# Altium PCB [R0] Receiver- BlackChat.PcbDoc
Units mil, origin at the board's own origin, x right, y up, seen from the top; angles counter-clockwise.
Board outline 1715 x 1265 mil, 2 copper layers (Top Layer, Bottom Layer); 45 components, 22 nets, 104 pads, 68 vias.
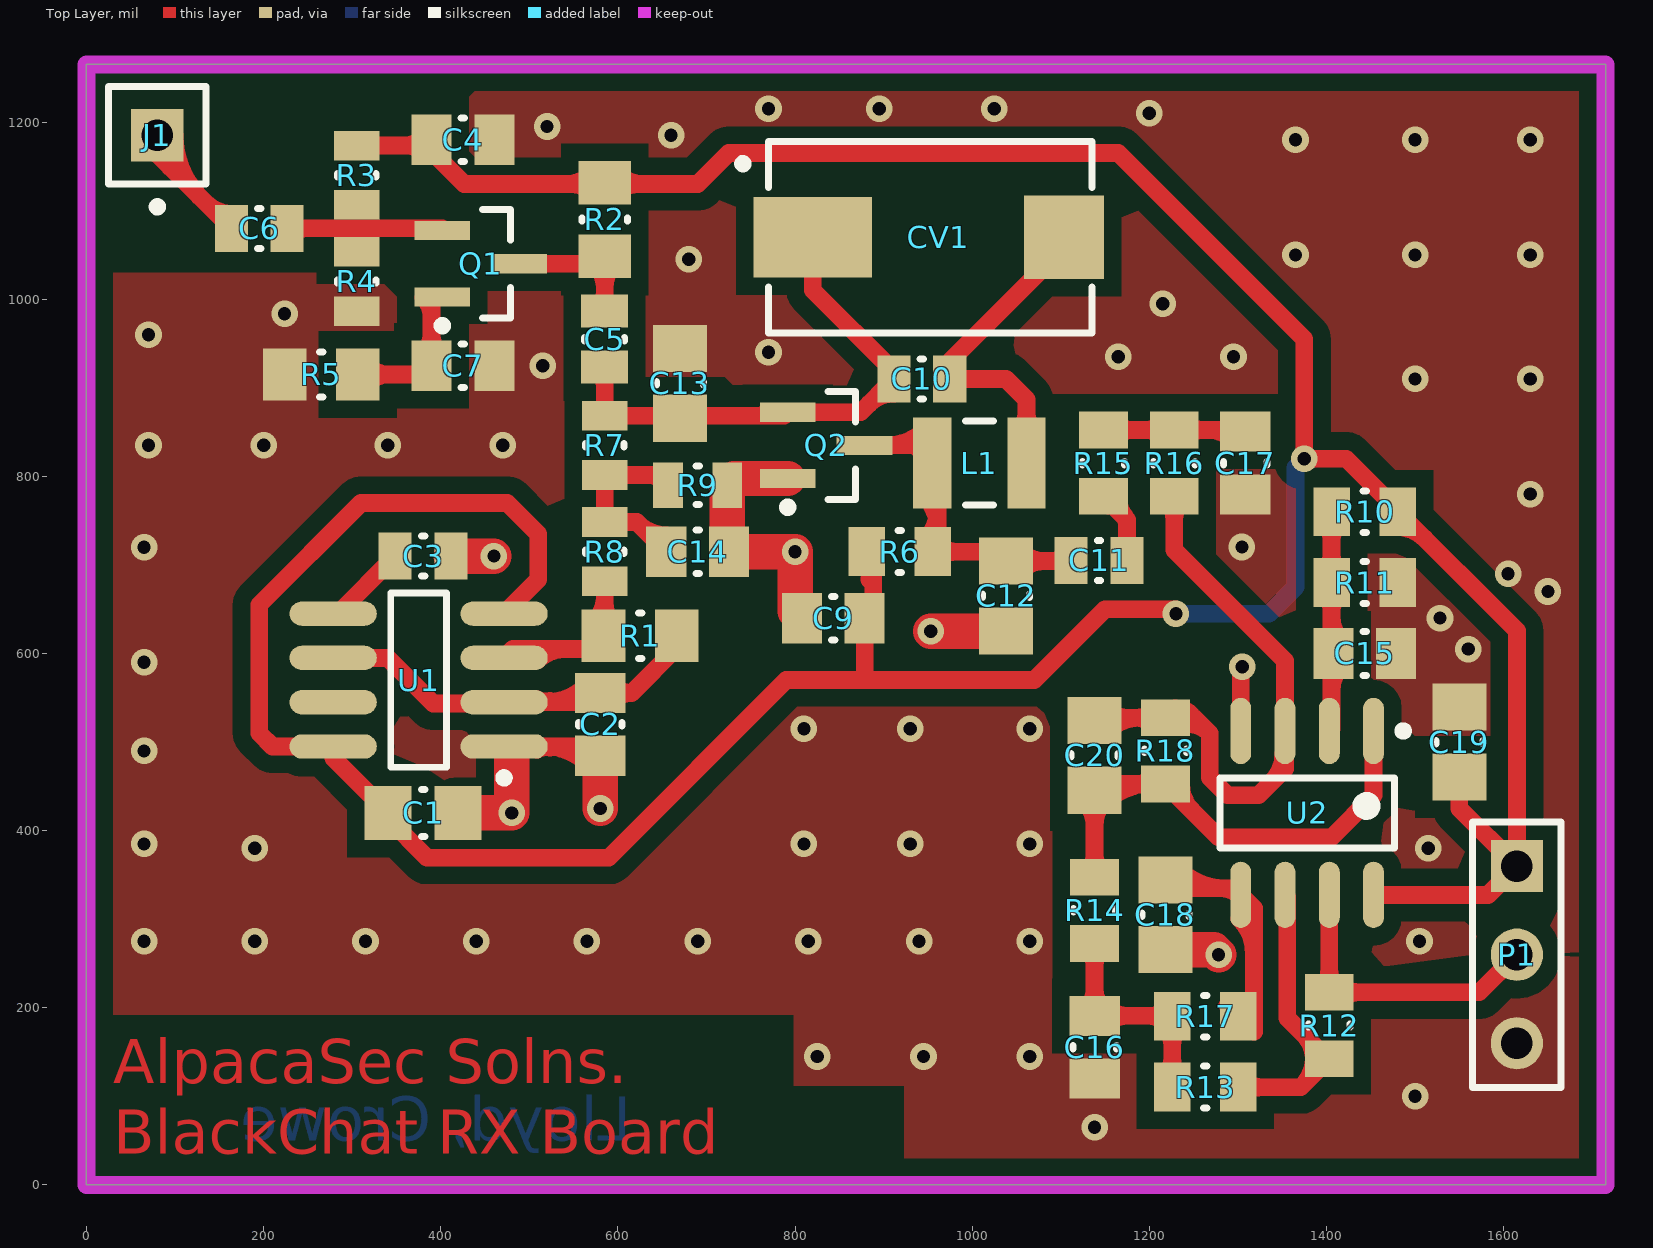
[diagram p0: Top Layer view]
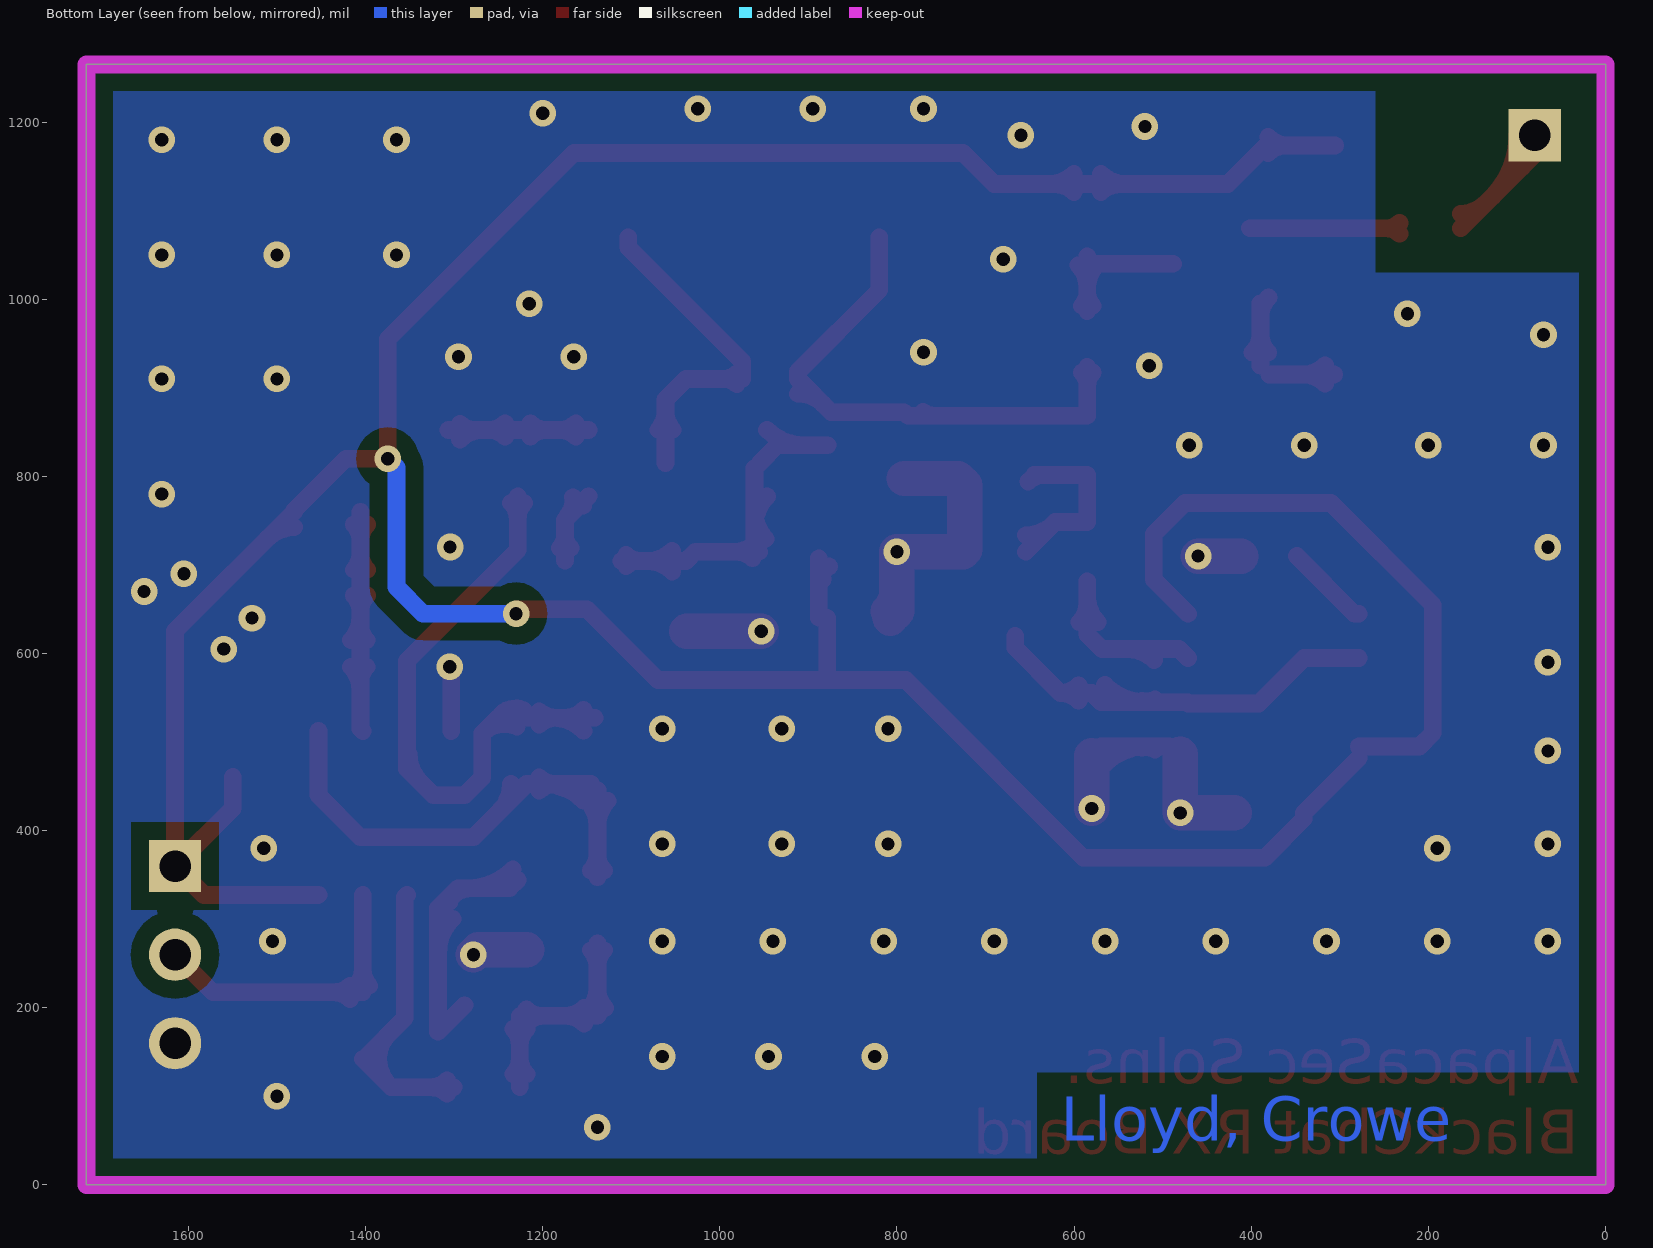
[diagram p1: Bottom Layer view, seen from below]

## Layer stack, top to bottom
Top Layer: signal copper 1.4
Dielectric: dielectric 12.6, FR-4, Dk 4.8
Bottom Layer: signal copper 1.4

## Board outline
0,0 1715,0 1715,1265 0,1265

## Design rules (kind name [scope] priority, off if disabled: settings)
Clearance "Clearance Polygon" [InPolygon] p1: gap=20
Clearance [All] p2: gap=10
PolygonConnect [All] p1: connectstyle=Direct reliefconductorwidth=10 reliefentries=4 polygonreliefangle="90 Angle" airgapwidth=10
RoutingVias [All] p1: holewidth=28 width=50 viastyle="Through Hole" minholewidth=28 minwidth=50 maxholewidth=28 maxwidth=50
SolderMaskExpansion [All] p1: expansion=4
Width [All] p1: maxlimit=100 minlimit=10 preferedwidth=10 minimp=50.000000 maximp=50.000000 favimp=50.000000
28 further rules are at their usual default settings.

## Components (designator, comment, footprint, x,y, rotation, side; value= is the part's Value field where it differs from the comment)
C1 "CAP 100nF 25V 0805(2012)" CAPC0805(2012)100_M 380,420 r0 top
C2 "CAP 1nF 25V 0805(2012)" CAPC0805(2012)100_N 580,520 r90 top
C3 "CAP 10nF 25V 0805(2012)" CAPC0805(2012)75_L 380,710 r180 top
C4 "CAP 1nF 16V 0805(2012)" CAPC0805(2012)145_N 425,1180 r180 top
C5 "CAP 2.2pF 16V 0805(2012)" CAPC0805(2012)75_L 585,955 r270 top
C6 "CAP 22pF 16V 0805(2012)" CAPC0805(2012)75_L 195,1080 r0 top
C7 "CAP 560pF 16V 0805(2012)" CAPC0805(2012)145_N 425,925 r0 top
C9 "CAP 10nF 16V 0805(2012)" CAPC0805(2012)145_N 843.15,640 r180 top
C10 "CAP 1.5pF 16V 0805(2012)" CAPC0805(2012)100_L 943.15,910 r0 top
C11 "CAP 100nF 16V 0805(2012)" CAPC0805(2012)100_L 1143.15,705 r0 top
C12 "CAP 5.6pF 16V 0805(2012)" CAPC0805(2012)75_M 1038.15,665 r90 top
C13 "CAP 5.6pF 16V 0805(2012)" CAPC0805(2012)75_M 670,905 r270 top
C14 "CAP 560pF 16V 0805(2012)" CAPC0805(2012)145_N 690,715 r180 top
C15 "CAP 10nF 16V 0805(2012)" CAPC0805(2012)145_N 1443.15,600 r180 top
C16 "CAP 10nF 16V 0805(2012)" CAPC0805(2012)145_N 1138.15,155.43 r90 top
C17 "CAP 1nF 25V 0805(2012)" CAPC0805(2012)100_N 1308.15,815 r90 top
C18 "CAP 100nF 25V 0805(2012)" CAPC0805(2012)100_M 1218.15,305 r270 top
C19 "CAP 100nF 25V 0805(2012)" CAPC0805(2012)100_M 1550,500 r90 top
C20 "CAP 5.6pF 16V 0805(2012)" CAPC0805(2012)75_M 1138.15,485 r90 top
CV1 "0.5-4.5pf" CAP-GSX364 820,1070 r0 top
J1 "Socket" PIN1 80,1185 r180 top
L1 "56nH" C1210 1008.15,815 r180 top
P1 "Header 3" HDR1X3 1615,360 r270 top
Q1 "NE68033" SOT95P275X120-3N 445,1040 r0 top
Q2 "NE68033" SOT95P275X120-3N 835,835 r0 top
R1 "3K3 5% 0805(2012)" RESC0805(2012)_M 625,620 r0 top
R2 "300R 1% 0805(2012)" RESC0805(2012)_M 585,1090 r90 top
R3 "47K 5% 0805(2012)" RESC0805(2012)_L 305,1140 r90 top
R4 "20K 5% 0805(2012)" RESC0805(2012)_L 305,1020 r90 top
R5 "100R 5% 0805(2012)" RESC0805(2012)_M 265,915 r0 top
R6 "1K 5% 0805(2012)" RESC0805(2012)_N 918.15,715 r180 top
R7 "47K 5% 0805(2012)" RESC0805(2012)_L 585,835 r90 top
R8 "10K 5% 0805(2012)" RESC0805(2012)_L 585,715 r270 top
R9 "10K 5% 0805(2012)" RESC0805(2012)_L 690,790 r180 top
R10 "47K 1% 0805(2012)" RESC0805(2012)_N 1443.15,760 r180 top
R11 "47K 1% 0805(2012)" RESC0805(2012)_N 1443.15,680 r0 top
R12 "1M 1% 0805(2012)" RESC0805(2012)_N 1403.15,180 r90 top
R13 "1K 5% 0805(2012)" RESC0805(2012)_N 1263.15,110.43 r0 top
R14 "10K 5% 0805(2012)" RESC0805(2012)_N 1138.15,310 r270 top
R15 "47K 1% 0805(2012)" RESC0805(2012)_N 1148.15,815 r90 top
R16 "20K 1% 0805(2012)" RESC0805(2012)_N 1228.15,815 r270 top
R17 "1M 1% 0805(2012)" RESC0805(2012)_N 1263.15,190.43 r0 top
R18 "1M 1% 0805(2012)" RESC0805(2012)_N 1218.15,490 r270 top
U1 "LMC555CM/NOPB" M08A_M 375,570 r180 top
U2 "TLC27M2BCD" TI-D8_L 1378.15,420 r270 top

## Footprints (in the part's own frame and the unit in brackets; to place one, negate y for a bottom-side part, rotate by r counter-clockwise, add the part's x,y. Pads: shape width x height; smd on the part's side, far side on the other; paste and mask are expansions set on the pad)
C1210 [mm] "Chip Capacitor, Body 3.2x2.5mm, IPC High Density"
  rect 1.1x2.6 smd: 1(-1.35,0) 2(1.35,0)
  silkscreen extent -0.4,-1.2 0.4,1.2, body extent -1.7,-1.35 1.7,1.35, height 1.3
CAP-GSX364 [mm] "Trimmer / Variable Capacitors .5-4.5 PF 100V"
  rect 3.4x2.3 smd: 1(0,0)
  rect 2.3x2.4 smd: 2(7.2,0)
  silkscreen extent -2.13,-2.75 8,2.75, body extent -1.27,-2.7 8,2.7, height 2.2
CAPC0805(2012)75_L [mm] "Chip Capacitor, Body 2.0x1.2mm, Height 0.75mm, IPC High Density"
  rect 0.95x1.35 smd: 1(-0.8,0) 2(0.8,0)
  silkscreen extent -0.05,-0.58 0.05,0.58, body extent -1.1,-0.72 1.1,0.72, height 0.75
CAPC0805(2012)75_M [mm] "Chip Capacitor, Body 2.0x1.2mm, Height 0.75mm, IPC Low Density"
  rect 1.35x1.55 smd: 1(-1,0) 2(1,0)
  silkscreen extent -0.05,-0.67 0.05,0.68, body extent -1.1,-0.72 1.1,0.72, height 0.75
CAPC0805(2012)100_L [mm] "Chip Capacitor, Body 2.0x1.2mm, Height 1.0mm, IPC High Density"
  rect 0.95x1.35 smd: 1(-0.8,0) 2(0.8,0)
  silkscreen extent -0.05,-0.58 0.05,0.58, body extent -1.1,-0.72 1.1,0.72, height 1
CAPC0805(2012)100_M [mm] "Chip Capacitor, Body 2.0x1.2mm, Height 1.0mm, IPC Low Density"
  rect 1.35x1.55 smd: 1(-1,0) 2(1,0)
  silkscreen extent -0.05,-0.67 0.05,0.67, body extent -1.1,-0.72 1.1,0.72, height 1
CAPC0805(2012)100_N [mm] "Chip Capacitor, Body 2.0x1.2mm, Height 1.0mm, IPC Medium Density"
  rect 1.15x1.45 smd: 1(-0.9,0) 2(0.9,0)
  silkscreen extent -0.05,-0.62 0.05,0.62, body extent -1.1,-0.72 1.1,0.73, height 1
CAPC0805(2012)145_N [mm] "Chip Capacitor, Body 2.0x1.2mm, Height 1.45mm, IPC Medium Density"
  rect 1.15x1.45 smd: 1(-0.9,0) 2(0.9,0)
  silkscreen extent -0.05,-0.62 0.05,0.62, body extent -1.1,-0.72 1.1,0.73, height 1.45
HDR1X3 [mm] "Connector; Header; 3 Position"
  rect 1.5x1.5 hole 0.9: 1(0,0)
  round 1.5 hole 0.9: 2(2.54,0) 3(5.08,0)
  silkscreen extent -1.27,-1.27 6.35,1.27
M08A_M [mm] "SOIC, 8-Leads, Body 4.9x3.9mm, Pitch 1.27mm, IPC Low Density"
  oval 2.5x0.7 smd: 1(-2.45,1.905) 2(-2.45,0.635) 3(-2.45,-0.635) 4(-2.45,-1.905) 5(2.45,-1.905) 6(2.45,-0.635) 7(2.45,0.635) 8(2.45,1.905)
  silkscreen extent -2.58,-2.5 0.8,2.93, body extent -2,-2.5 2,2.5, height 1.75
PIN1 [mm] "Connector; Plug"
  rect 1.5x1.5 hole 0.9: 1(0,0)
  silkscreen extent -1.4,-1.4 1.4,2.17
RESC0805(2012)_L [mm] "Chip Resistor, Body 2.0x1.3mm, IPC High Density"
  rect 0.85x1.3 smd: 1(-0.85,0) 2(0.85,0)
  silkscreen extent -0.05,-0.55 0.05,0.55, body extent -1.1,-0.67 1.1,0.68, height 0.7
RESC0805(2012)_M [mm] "Chip Resistor, Body 2.0x1.3mm, IPC Low Density"
  rect 1.25x1.5 smd: 1(-1.05,0) 2(1.05,0)
  silkscreen extent -0.05,-0.65 0.05,0.65, body extent -1.1,-0.67 1.1,0.67, height 0.7
RESC0805(2012)_N [mm] "Chip Resistor, Body 2.0x1.3mm, IPC Medium Density"
  rect 1.05x1.4 smd: 1(-0.95,0) 2(0.95,0)
  silkscreen extent -0.05,-0.6 0.05,0.6, body extent -1.1,-0.67 1.1,0.68, height 0.7
SOT95P275X120-3N [mm] "SOT23, 3-Leads, Body 2.90x2.75mm, Pitch 0.95mm, IPC Medium Density"
  rect 1.6x0.55 smd: 1(-1.1,-0.95) 2(-1.1,0.95) 3(1.1,0)
  silkscreen extent -1.22,-1.9 0.85,1.55, body extent -0.85,-1.55 0.85,1.55, height 1.2
TI-D8_L [mm] "SOIC, 8-Leads, Body 4.9x3.9mm, Pitch 1.27mm, IPC High Density"
  oval 1.9x0.6 smd: 1(-2.35,1.905) 2(-2.35,0.635) 3(-2.35,-0.635) 4(-2.35,-1.905) 5(2.35,-1.905) 6(2.35,-0.635) 7(2.35,0.635) 8(2.35,1.905)
  silkscreen extent -2.47,-2.5 1,2.88, body extent -2,-2.5 2,2.5, height 1.75

## Part data
C1 C18 C19: library part CMP-1036-04409-1, "CAP 100nF 25V ±5% 0805 (2012 Metric) Thickness 1mm SMD"
C2 C17: library part CMP-1036-02963-1, "CAP 1nF 25V ±1% 0805 (2012 Metric) Thickness 1mm SMD"
C3: library part CMP-1036-03827-1, "CAP 10nF 25V ±5% 0805 (2012 Metric) Thickness 0.75mm SMD"
C4: library part CMP-1036-02959-1, "CAP 1nF 16V ±10% 0805 (2012 Metric) Thickness 1.45mm SMD"
C5: library part CMP-1036-00271-1, "CAP 2.2pF 16V ±0.5pF 0805 (2012 Metric) Thickness 0.75mm SMD"
C6: library part CMP-1036-01219-1, "CAP 22pF 16V ±5% 0805 (2012 Metric) Thickness 0.75mm SMD"
C7 C14: library part CMP-1036-02734-1, "CAP 560pF 16V ±10% 0805 (2012 Metric) Thickness 1.45mm SMD"
C9 C15 C16: library part CMP-1036-03817-1, "CAP 10nF 16V ±5% 0805 (2012 Metric) Thickness 1.45mm SMD"
C10: library part CMP-1036-00160-1, "CAP 1.5pF 16V ±0.1pF 0805 (2012 Metric) Thickness 1mm SMD"
C11: library part CMP-1036-04400-1, "CAP 100nF 16V ±5% 0805 (2012 Metric) Thickness 1mm SMD"
C12 C13 C20: library part CMP-1036-00602-1, "CAP 5.6pF 16V ±0.25pF 0805 (2012 Metric) Thickness 0.75mm SMD"
CV1: library part GSX364, "0.5pF to 4.5pF variable capacitor."
L1: library part Inductor, "Generic Inductor"
P1: "Header, 3-Pin"
Q1 Q2: "NPN SILICON HIGH FREQUENCY TRANSISTOR"
R1: library part CMP-1013-00086-1, "3K3 0.125W 5% 0805 (2012 Metric)  SMD"
R2: library part CMP-1013-00449-1, "300R 0.125W 1% 0805 (2012 Metric)  SMD"
R3 R7: library part CMP-1013-00114-1, "47K 0.125W 5% 0805 (2012 Metric)  SMD"
R4: library part CMP-1013-00105-1, "20K 0.125W 5% 0805 (2012 Metric)  SMD"
R5: library part CMP-1013-00050-1, "100R 0.125W 5% 0805 (2012 Metric)  SMD"
R6 R13 R14: library part CMP-1013-00074-1, "1K 0.125W 5% 0805 (2012 Metric)  SMD"
R8 R9: library part CMP-1013-00098-1, "10K 0.125W 5% 0805 (2012 Metric)  SMD"
R10 R11 R15: library part CMP-1013-00699-1, "47K 0.125W 1% 0805 (2012 Metric)  SMD"
R12 R17 R18: library part CMP-1013-00849-1, "1M 0.125W 1% 0805 (2012 Metric)  SMD"
R16: library part CMP-1013-00655-1, "20K 0.125W 1% 0805 (2012 Metric)  SMD"
U1: library part CMP-0056-00124-2, "CMOS Timer, 8-pin Narrow SOIC, Pb-Free"
U2: library part CMP-0017-00353-1, "LinCMOS(TM) Precision Dual Operational Amplifier, 3 to 16 V, 0 to 70 degC, 8-pin SOIC (D8), Green (RoHS & no Sb/Br)"

## Via types
v1: diameter 30, hole 15, Top Layer to Bottom Layer, 68 vias

## Nets (pads, with @x,y where several pads share a name; then routed paths per layer and width w, separated by ;. In a path a pad name is that pad's centre, name@x,y a point inside that pad or via, vN(x,y) a via of type N, cw(c..) or ccw(c..) an arc to the next point about the centre after c; other vN are vias at no path point)
5V0: C1.1 C4.2 C9.1 C19.1 P1.1 R2.2 R3.2 R6.2 R10.1 U1.4 U1.8 U2.8 | length 4692.7
  Top Layer w20: U1.8@278.54,482.09 C1.1 340.63,413.37 384.51,369.49 589.49,369.49 790,570 1070,570 1150,650 v1@1230,650 ; U1.8 210,495 195,510 195,655 310,770 475,770 510,735 510,683.54 U1.4 ; R3.2 383.03,1173.46 426.5,1130 690,1130 725,1165 1165,1165 1375,955 v1(1375,820) 1422.26,820 1480.55,761.71 R10.1 1615,625.55 P1.1 ; 357.53,1173.46 ccw(c357.53,1206.13) C4.2@380.63,1183.03 ; 360.58,1173.46 cw(c360.58,1145.1) C4.2@380.63,1165.16 ; 541.59,1130 ccw(c541.59,1169.83) R2.2@569.75,1141.67 ; 548.05,1130 cw(c548.05,1099.31) R2.2@569.75,1121.01 ; R2.2@600.25,1121.01 cw(c621.95,1099.31) 621.95,1130 ; R2.2@600.25,1141.67 ccw(c628.41,1169.83) 628.41,1130 ; R6.2@876.67,698.25 cw(c871.93,686.81) 883.89,683.61 ; 878.58,571.42 C9.1 ; C9.1@888.15,640.43 R6.2@888.15,707.6 ; U2.8 1453.21,327.42 1582.42,327.42 P1.1 ; R10.1@1480.55,742.44 cw(c1480.55,700.05) 1510.53,730.03 ; C19.1 1550,425 P1.1
  Bottom Layer w20: v1(1230,645) 1335,645 1365,675 1365,810 v1(1375,820)
AMP_BUFFER: C5.1 Q1.3 R2.1 | length 235.9
  Top Layer w20: Q1.3 R2.1@573.66,1040 ; R2.1@574.67,1038.33 cw(c549.74,1013.4) 585,1013.4 cw(c620.26,1013.4) R2.1@595.33,1038.33 ; C5.1@578.85,992.65 ccw(c563.99,1007.5) 585,1007.5 ccw(c606.01,1007.5) C5.1@591.15,992.65 ; C5.1 R2.1
ANTENNA: C6.1 J1.1 | length 288.7
  Top Layer w20: J1.1@79.53,1185 ccw(c130.28,1185) 94.39,1149.11 ; J1.1 80,1163.5 C6.1 ; J1.1@99.53,1185 ccw(c198.57,1185) 128.54,1114.97 ; 135.21,1108.29 ccw(c163.5,1136.59) C6.1@163.5,1096.57
DATA_RX: P1.2 R12.2 U2.7 | length 420.5
  Top Layer w20: R12.2@1395.61,224.95 ccw(c1377.39,243.16) 1403.15,243.16 ccw(c1428.91,243.16) R12.2@1410.69,224.95 ; U2.7@1403.15,327.48 1403.15,217.4 1572.4,217.4 P1.2 ; R12.2@1417.58,209.86 cw(c1435.8,191.64) 1435.8,217.4 cw(c1435.8,243.16) R12.2@1417.58,224.95
DETECTOR: C11.1 C12.2 L1.2 Q2.3 R6.1 | length 594.7
  Top Layer w20: Q2.3 935,835 L1.2 ; Q2.3@903.86,835 ccw(c903.86,895.66) L1.2@946.76,852.77 ; L1.2@946.76,777.23 cw(c912.99,743.46) 960.75,743.46 ; R6.1@948.01,729.43 ccw(c917.25,760.19) 960.75,760.19 ; R6.1 1027.52,715 1038.15,704.37 C11.1@1111.02,704.37 ; R6.1@960.75,715 L1.2@960.75,809.25 ; R6.1@963.1,707.46 cw(c981.31,689.24) 981.31,715 cw(c981.31,740.76) R6.1@963.1,722.54 ; C12.2@1053.81,692.65 cw(c1082.1,664.35) 1082.1,704.37 cw(c1082.1,744.38) C12.2@1053.81,716.09 ; 1089.13,704.37 ccw(c1089.13,727.53) C11.1@1105.5,711.15 ; 1092.17,704.37 cw(c1092.17,685.51) C11.1@1105.5,698.85
FILTER: C16.2 R13.1 R14.2 R17.1 | length 506.6
  Top Layer w20: C16.2@1129.21,199.8 ccw(c1107.64,221.38) 1138.15,221.38 ccw(c1168.66,221.38) C16.2@1147.09,199.8 ; R14.2@1130.61,265.05 cw(c1112.39,246.84) 1138.15,246.84 cw(c1163.91,246.84) R14.2@1145.69,265.05 ; R14.2@1138.15,272.6 1138.15,190.87 R17.1@1225.32,190.87 ; C16.2@1152.99,181.93 cw(c1174.57,160.36) 1174.57,190.87 cw(c1174.57,221.38) C16.2@1152.99,199.8 ; 1198.95,190.87 cw(c1198.95,163.63) R17.1@1218.2,182.89 ; 1201.03,190.87 ccw(c1201.03,215.15) R17.1@1218.2,197.98 ; R13.1@1218.2,124.87 ccw(c1199.99,143.08) 1225.75,143.08 ccw(c1251.51,143.08) R13.1@1233.29,124.87 ; R17.1@1218.2,176 cw(c1199.99,157.79) 1225.75,157.79 cw(c1251.51,157.79) R17.1@1233.29,176 ; R13.1 R17.1
GND: C1.2 C2.1 C3.1 C4.1 C7.2 C9.2 C12.1 C13.1 C14.1 C15.1 C16.1 C17.1 C18.2 C19.2 P1.3 Q2.1 R4.1 R5.1 R9.1 R11.2 U1.1 U2.4 | length 934.4
  Top Layer w20: U1.1@492.32,495 569.57,495 C2.1 ; U1.1@508.78,491.73 cw(c518.43,475.02) 523.42,493.65 ; U1.1@518.4,495 cw(c518.4,428.87) C2.1@565.16,475.63 ; U2.4 v1@1303.15,583.15
  Top Layer w40: C3.1 v1(460,710) ; C1.2 v1(480,420) U1.1@480,486.46 ; v1(580,425) C2.1 ; C14.1@723.46,716.97 R9.1 731.06,797.6 Q2.1 ; C14.1 v1(800,715) 800,647.72 C9.2 ; 800,670.9 ccw(c832.71,670.9) C9.2@809.58,647.77 ; v1(953.15,625) C12.1@1037.52,625 ; C18.2@1218.15,265.63 1272.52,265.63 v1(1278.15,260)
  other v1: 1138.15,65 1500,100 825,145 945,145 1065,145 65,275 190,275 315,275 440,275 565,275 690,275 815,275 940,275 1065,275 1505,275 190,380 1515,380 65,385 810,385 930,385 1065,385 65,490 810,515 930,515 1065,515 1305,585 65,590 1560,605 1528.15,640 1650,670 1605,690 65,720 1304.5,720.26 1630,780 70,835 200,835 340,835 470,835 1500,910 1630,910 515,925 1165,935 1295,935 770,940 70,960 223.66,983.66 1215,995 680,1045 1365,1050 1500,1050 1630,1050 1365,1180 1500,1180 1630,1180 660,1185 520,1195 1200,1210 770,1215 895,1215 1025,1215
NetC2_2: C2.2 R1.2 U1.2 U1.6 | length 562.3
  Top Layer w20: U1.6 340,595 391.46,543.54 471.46,543.54 U1.2 569.57,545 C2.2 615.43,555.43 ; U1.2@508.78,548.27 ccw(c518.42,564.98) 523.42,546.35 ; U1.2@518.39,545 ccw(c518.39,611.13) C2.2@565.16,564.37 ; C2.2@595.05,546.71 cw(c615.43,527.26) 615.43,555.43 ; C2.2@595.05,564.16 ccw(c615.43,583.6) 615.43,555.43 ; R1.2 666.34,606.34 615.43,555.43
NetC3_2: C3.2 U1.5 | length 96.9
  Top Layer w20: U1.5 283.5,645 C3.2
NetC5_2: C5.2 C10.1 C13.2 CV1.1 Q2.2 R7.2 | length 667.8
  Top Layer w20: C5.2@578.85,917.35 cw(c563.99,902.5) 585,902.5 cw(c606.01,902.5) C5.2@591.15,917.35 ; C5.2 R7.2 Q2.2@787.76,868.46 ; 759.52,868.46 ccw(c759.52,883.9) Q2.2@770.44,872.99 ; Q2.2 874.06,872.4 C10.1 911.65,918.35 820,1010 CV1.1 ; 883.36,881.7 cw(c911.65,853.41) C10.1@911.65,893.43
NetC6_2: C6.2 Q1.2 R3.1 R4.2 | length 194.7
  Top Layer w20: C6.2@232.65,1073.85 cw(c247.5,1058.99) 247.5,1080 cw(c247.5,1101.01) C6.2@232.65,1086.15 ; C6.2@240,1080 Q1.2@401.69,1080
NetC7_1: C7.1 Q1.1 R5.2 | length 271.5
  Top Layer w20: R5.2 C7.1@379.57,915 ; R5.2@316.67,904.67 cw(c341.6,879.74) 341.6,915 cw(c341.6,950.26) R5.2@316.67,925.33 ; Q1.1@380.44,1002.01 cw(c358.4,979.97) 389.57,979.97 ; C7.1@380.63,939.84 ccw(c359.06,961.41) 389.57,961.41 ccw(c420.08,961.42) C7.1@398.5,939.84 ; C7.1 Q1.1@389.57,995.47
NetC10_2: C10.2 CV1.2 L1.1 | length 458.6
  Top Layer w20: C10.2@980.8,903.85 cw(c995.65,888.99) 995.65,910 cw(c995.65,931.01) C10.2@980.8,916.15 ; L1.1@1053.06,852.77 ccw(c1033.17,872.66) 1061.3,872.66 ccw(c1089.44,872.66) L1.1@1069.54,852.77 ; L1.1 1061.3,886.85 1038.15,910 C10.2 974.65,929.65 1103.46,1058.46 CV1.2
NetC11_2: C11.2 R15.1 | length 177.7
  Top Layer w20: R15.1@1148.15,777.6 1174.65,751.1 ; R15.1@1154.14,766.97 cw(c1152.24,744.64) 1174.65,744.64 ; R15.1@1165.65,776.49 ccw(c1196.77,773.23) 1174.64,751.1 ; C11.2@1168.49,719.03 ccw(c1153.64,733.88) 1174.65,733.88 ccw(c1195.65,733.88) C11.2@1180.8,719.03 ; C11.2 1174.65,751.1
NetC14_2: C14.2 R7.1 R8.1 R9.2 | length 251.6
  Top Layer w20: 622.91,746.65 ccw(c654.57,778.31) C14.2@654.57,733.54 ; 633.82,801.54 cw(c633.82,776.14) R9.2@651.78,794.1 ; R9.2@645,801.54 R7.1 R8.1 621.1,748.46 C14.2
NetC15_2: C15.2 R10.2 R11.1 U2.2 | length 465.8
  Top Layer w20: R11.1@1398.2,665.57 cw(c1379.99,647.35) 1405.75,647.35 cw(c1431.51,647.35) R11.1@1413.29,665.57 ; R11.1@1398.2,694.43 ccw(c1379.99,712.65) 1405.75,712.65 ccw(c1431.51,712.65) R11.1@1413.29,694.43 ; R10.2@1398.2,745.57 cw(c1379.99,727.35) 1405.75,727.35 cw(c1431.51,727.35) R10.2@1413.29,745.57 ; C15.2@1398.78,585.16 cw(c1381.96,568.34) 1405.75,568.34 ; C15.2@1398.78,614.84 ccw(c1381.96,631.66) 1405.75,631.66 ; U2.2@1403.15,512.52 1405.75,515.12 R10.2 ; 1405.75,558.83 cw(c1442.98,558.83) C15.2@1416.65,585.16 ; 1405.75,641.17 ccw(c1442.98,641.17) C15.2@1416.65,614.84
NetC17_2: C17.2 R15.2 R16.1 | length 327.3
  Top Layer w20: R15.2@1148.15,852.4 C17.2@1306.18,852.4 ; R15.2@1162.58,844.86 cw(c1180.8,826.64) 1180.8,852.4 cw(c1180.8,878.16) R15.2@1162.58,859.95 ; R16.1@1213.72,844.86 ccw(c1195.5,826.64) 1195.5,852.4 ccw(c1195.5,878.16) R16.1@1213.72,859.95 ; R16.1@1242.58,844.86 cw(c1260.8,826.64) 1260.8,852.4 cw(c1260.8,878.16) R16.1@1242.58,859.95 ; 1266.98,852.4 cw(c1266.98,815.17) C17.2@1293.31,841.5 ; 1276.48,852.4 ccw(c1276.48,876.19) C17.2@1293.31,859.37
NetC18_1: C18.1 R17.2 U2.5 | length 455.5
  Top Layer w20: C18.1@1228.15,344.37 1237.52,335 1295.63,335 1303.15,327.48 1318.15,312.48 1318.15,172.83 R17.2@1288.15,202.83 ; C18.1@1233.81,356.09 ccw(c1284.72,407.01) 1284.72,335 ; 1280.62,335 cw(c1280.62,304.95) U2.5@1301.87,326.2 ; U2.5@1301.87,300.61 cw(c1262.57,261.31) 1318.15,261.31 ; U2.5@1302.99,300.09 cw(c1301.53,283.53) 1318.15,283.53 ; U2.5@1304.75,320.01 cw(c1303.46,305.37) 1318.15,305.37
NetC20_1: C20.1 R14.1 R18.2 U2.1 | length 750.5
  Top Layer w20: C20.1@1126.43,433.91 cw(c1098.14,405.62) 1138.15,405.62 cw(c1178.17,405.61) C20.1@1149.87,433.91 ; R14.1@1130.61,354.95 ccw(c1112.39,373.16) 1138.15,373.16 ccw(c1163.91,373.16) R14.1@1145.69,354.95 ; R14.1@1138.15,347.4 C20.1@1138.15,445.63 ; C20.1@1145.12,452.6 1218.15,452.6 1278.15,392.6 1405.75,392.6 1453.15,440 U2.1@1453.15,512.52 ; C20.1@1153.81,433.91 cw(c1198.93,388.79) R18.2@1198.93,452.6 ; R18.2@1203.72,445.05 ccw(c1185.5,426.84) 1185.5,452.6 ccw(c1185.5,478.35) R18.2@1203.72,460.14 ; R18.2@1235.71,452.6 ccw(c1278.1,452.6) 1248.12,422.62
NetC20_2: C20.2 R16.2 R18.1 U2.3 | length 938.9
  Top Layer w20: C20.2@1141.18,527.4 1250.75,527.4 ; C20.2@1153.81,512.65 cw(c1189.42,477.04) 1189.42,527.4 ; C20.2@1153.81,536.09 ccw(c1174.78,557.07) 1174.78,527.4 ; R18.1@1203.72,519.86 ccw(c1185.5,501.64) 1185.5,527.4 ccw(c1185.5,553.16) R18.1@1203.72,534.95 ; R16.2@1220.61,770.05 cw(c1202.39,751.84) 1228.15,751.84 cw(c1253.91,751.84) R16.2@1235.69,770.05 ; R18.1@1221.4,535.99 cw(c1230.57,514.37) 1247.17,530.98 ; R16.2@1228.15,777.6 1228.15,716.85 1353.15,591.85 1353.15,470 1323.15,440 1288.15,440 1268.15,460 1268.15,510 ; R18.1@1229.2,517.58 cw(c1243.06,484.91) 1268.15,510 ; R18.1@1232.59,519.87 cw(c1250.75,501.77) 1250.75,527.4 ; R18.1@1232.59,534.94 ccw(c1250.75,553.04) 1250.75,527.4 ; 1338.09,454.94 ccw(c1306.1,486.93) U2.3@1351.34,486.93 ; 1250.75,527.4 1268.15,510
NetR12_1: R12.1 R13.2 U2.6 | length 426.3
  Top Layer w20: R13.2 1370.98,110.43 1403.15,142.6 1401.44,142.6 1355.59,188.45 1355.59,325.04 U2.6@1353.15,327.48 ; R13.2@1308.1,102.89 cw(c1326.31,84.68) 1326.31,110.43 cw(c1326.31,136.19) R13.2@1308.1,117.98 ; 1373.18,112.62 ccw(c1343.2,142.6) 1385.59,142.6 ccw(c1347.33,142.6) 1374.38,169.65
QUENCH: R1.1 R8.2 U1.3 | length 272.1
  Top Layer w20: U1.3 481.46,605 568.66,605 R1.1 ; U1.3@509.56,592.33 cw(c540.16,561.73) 540.16,605 ; R1.1@573.33,635.25 ccw(c545.17,663.41) 585,663.41 ; R1.1@585,621.34 R8.2 ; 585,656.95 ccw(c615.69,656.95) R1.1@593.99,635.25
pads on no net: U1.7

## Polygon pours and split planes (outlines as drawn)
GND on Bottom Layer "Ground Plane" (solid, remove dead copper, pour order 4): -0.39,0.2 1714.61,0.2 1714.61,1265.2 -0.39,1265.2
GND on Top Layer "Ground Plane" (solid, remove dead copper, pour order 3): 0,0 1714.22,0 1714.22,1265 0,1265

## Keep-outs
Keep-Out Layer:
  lines w20: 0,1190 0,1265 1715,1265 1715,0 0,0 0,330 0,1205

## Other copper
Top Layer:
  pour cut-out: 0,1265 0,1030 260,1030 260,1265
  text "AlpacaSec Solns." at 30,115 h50
  text "BlackChat RX Board" at 30,35 h50
Bottom Layer:
  pour cut-out: 0,1265 0,1030 260,1030 260,1265
  text "Lloyd, Crowe" at 615,50 h50